# Altium PCB PSoC6 Cardiac Arrest PCB.PcbDoc
Units mil, origin at the board's own origin, x right, y up, seen from the top; angles counter-clockwise.
Board outline 1664 x 1916 mil, 4 copper layers (Top Layer, Layer 1, Layer 2, Bottom Layer), stack 23.756 mil thick; 48 components, 37 nets, 268 pads, 72 vias.
Unrouted connection lines stored in the file: 18.
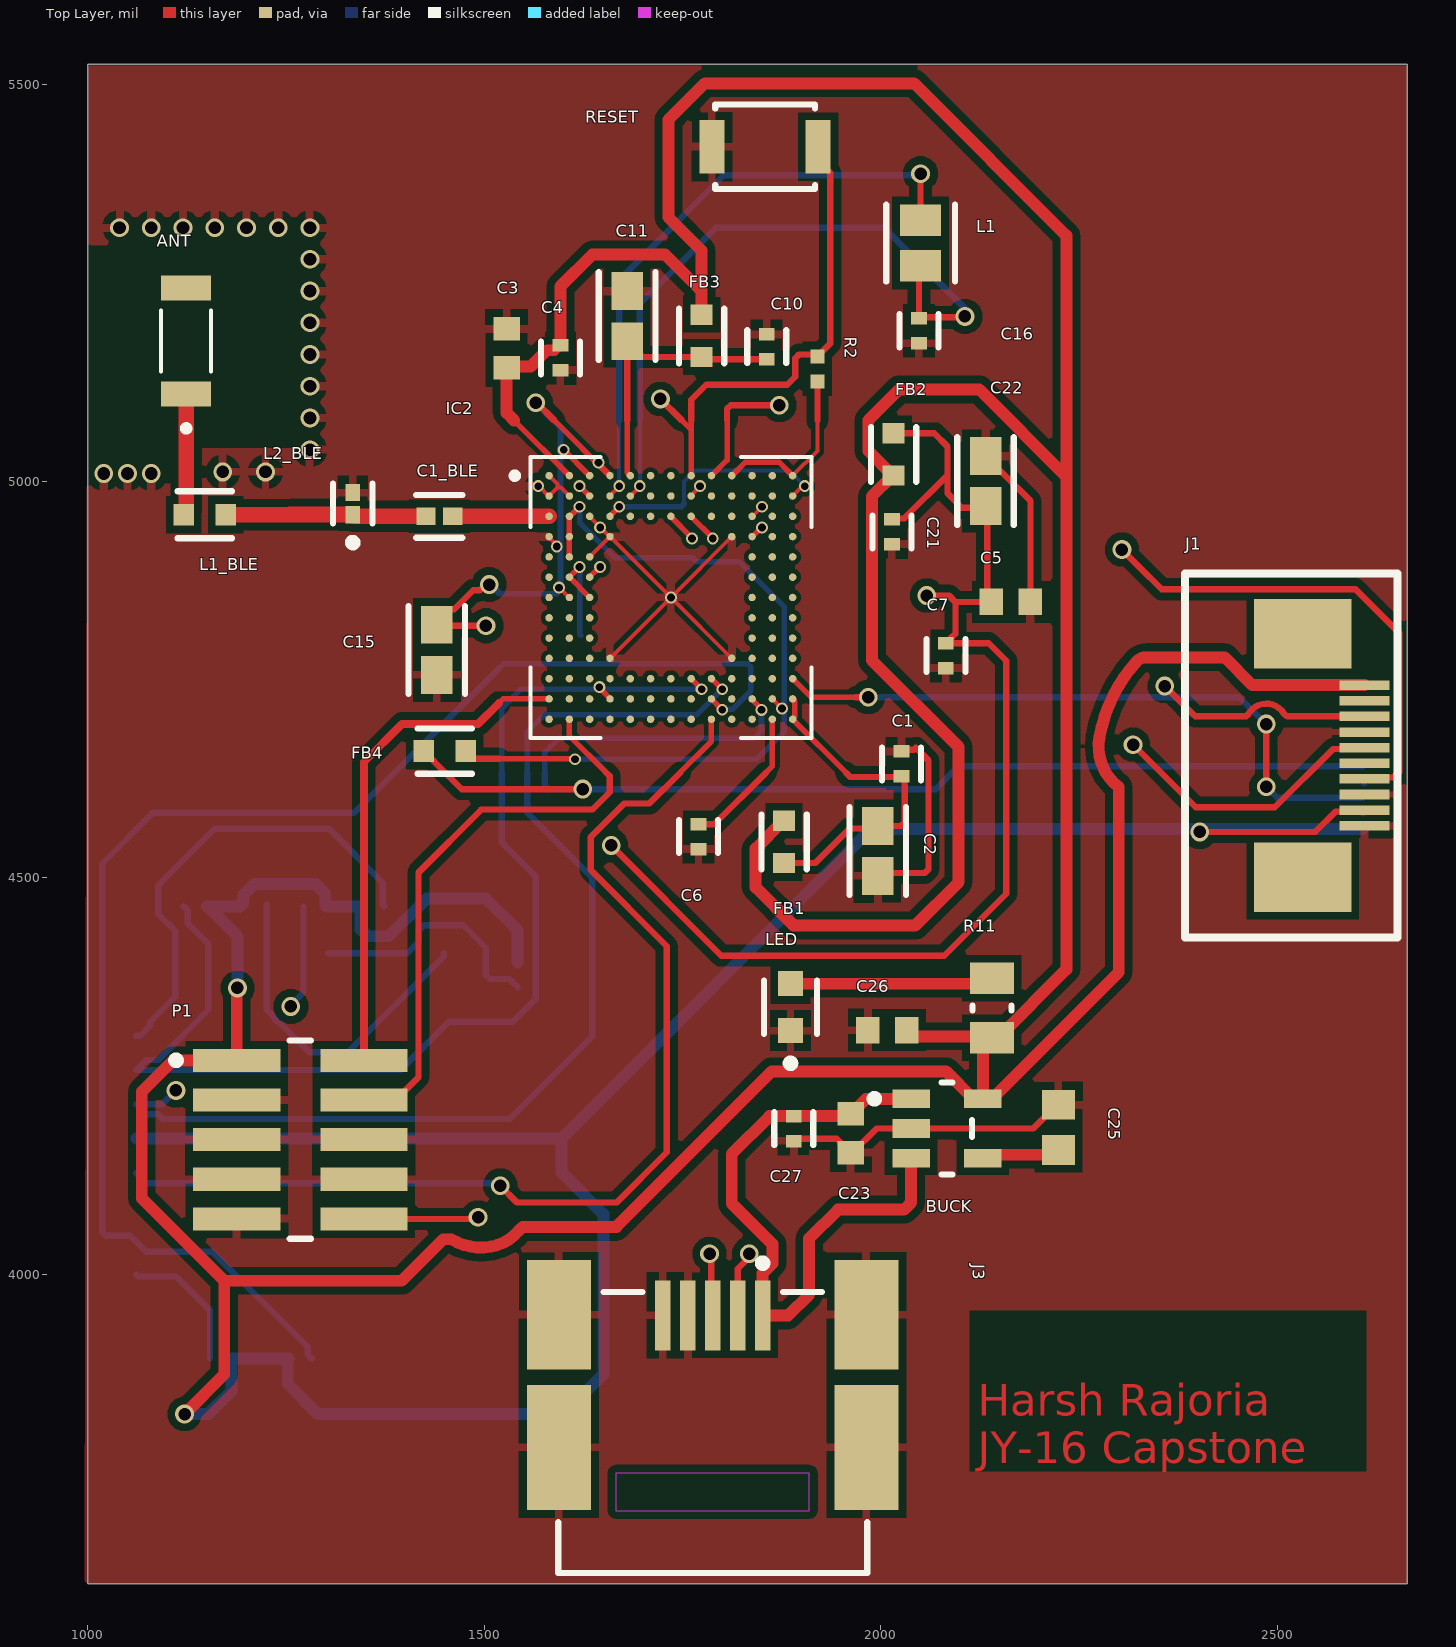
[diagram p0: Top Layer view]
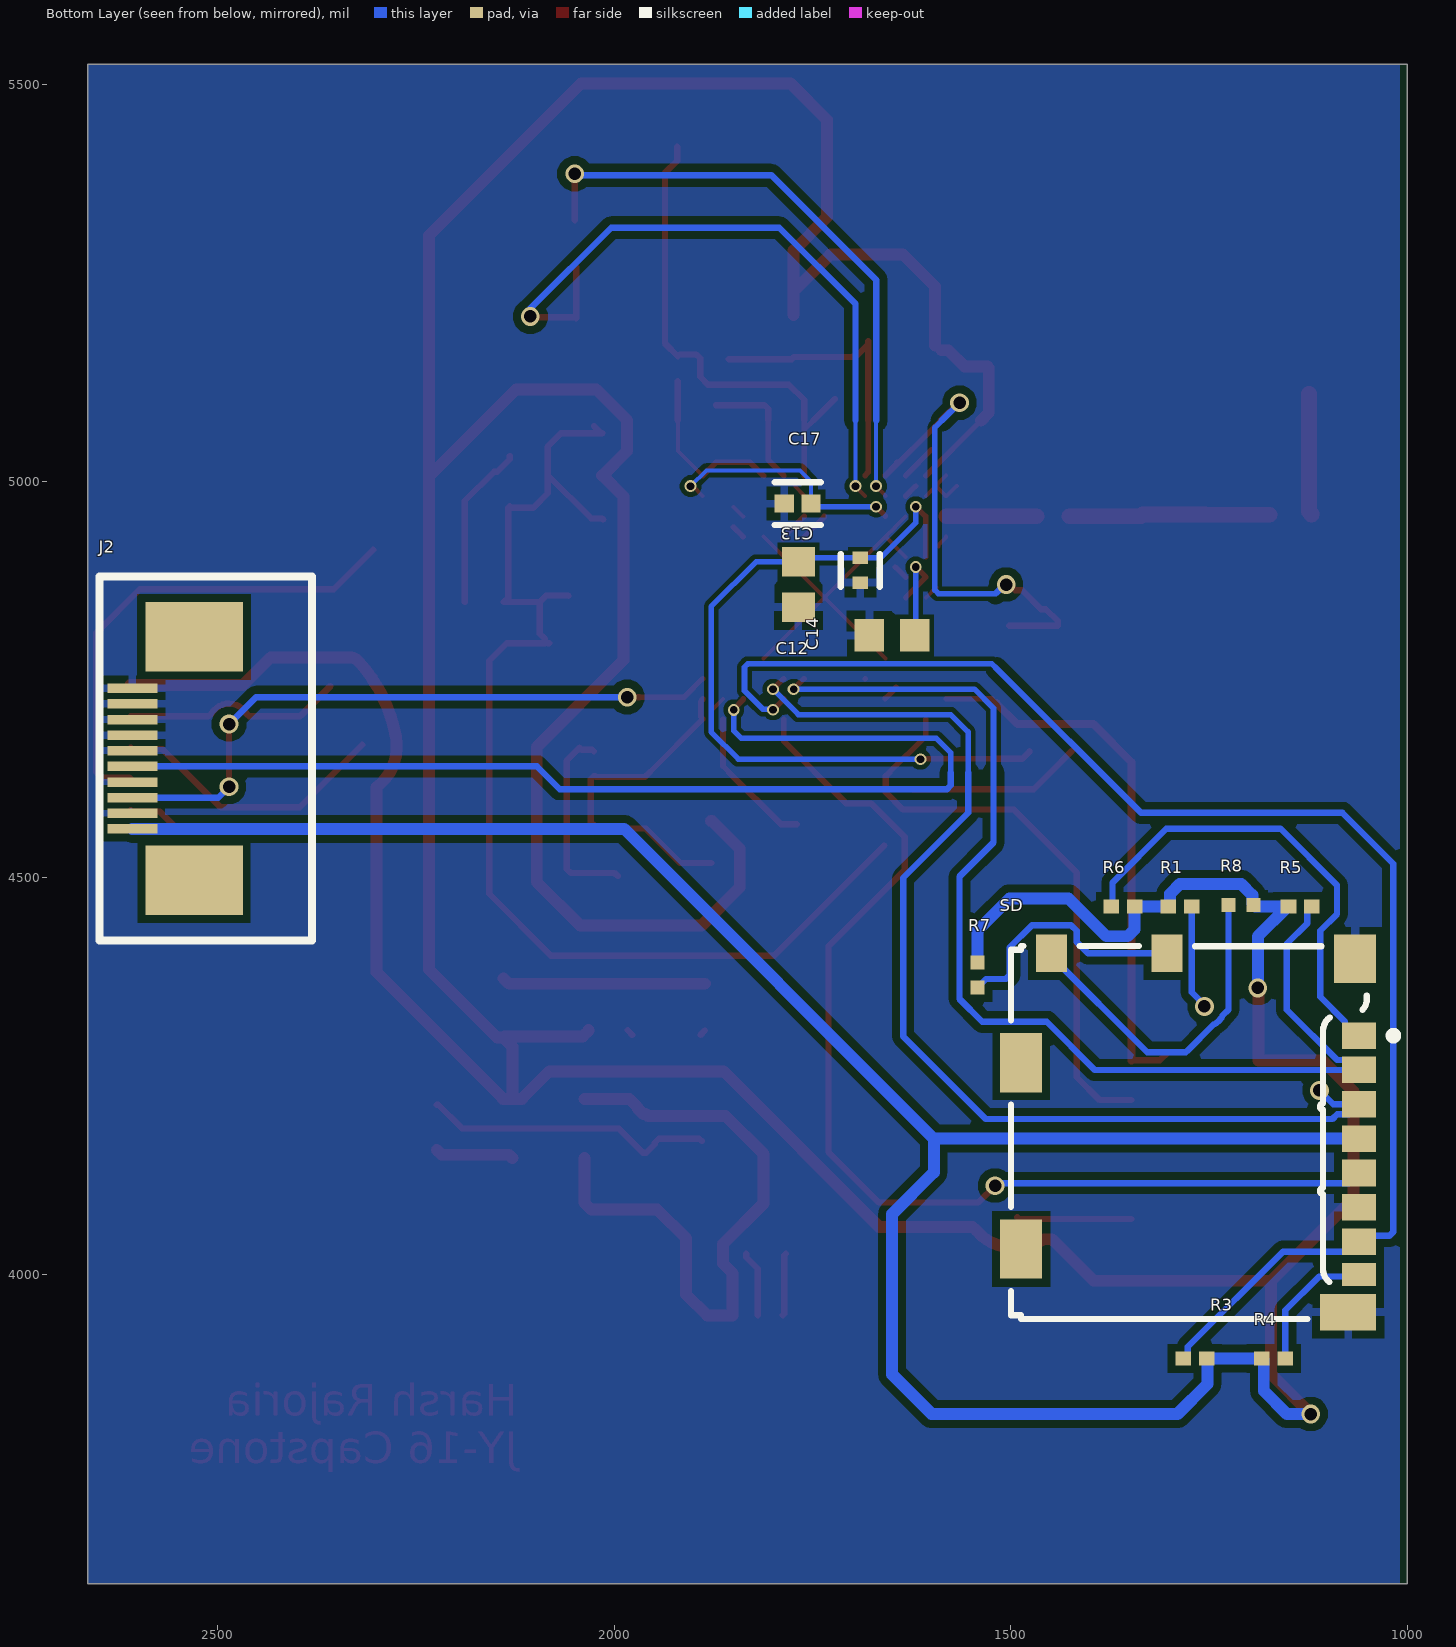
[diagram p1: Bottom Layer view, seen from below]
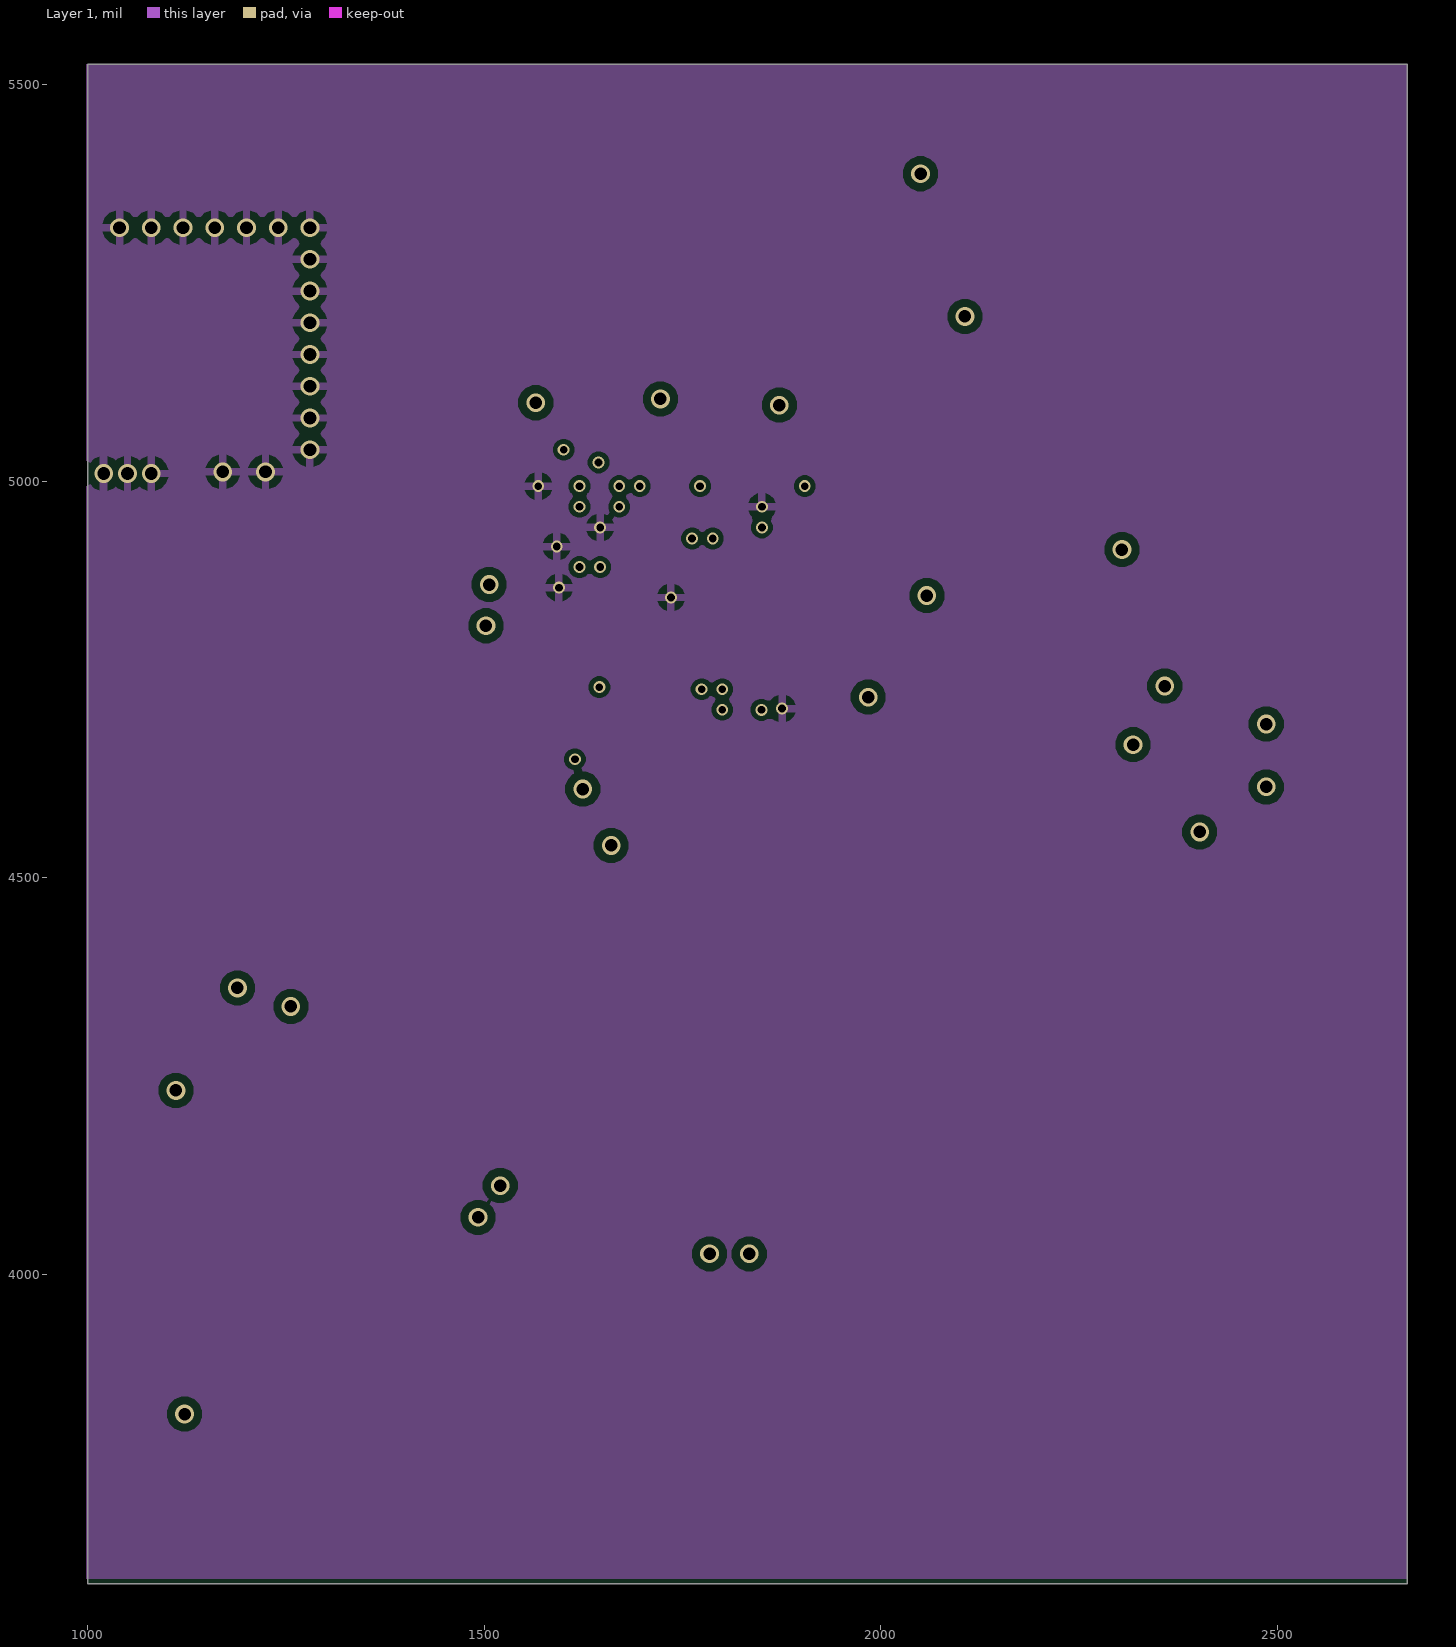
[diagram p2: Layer 1]
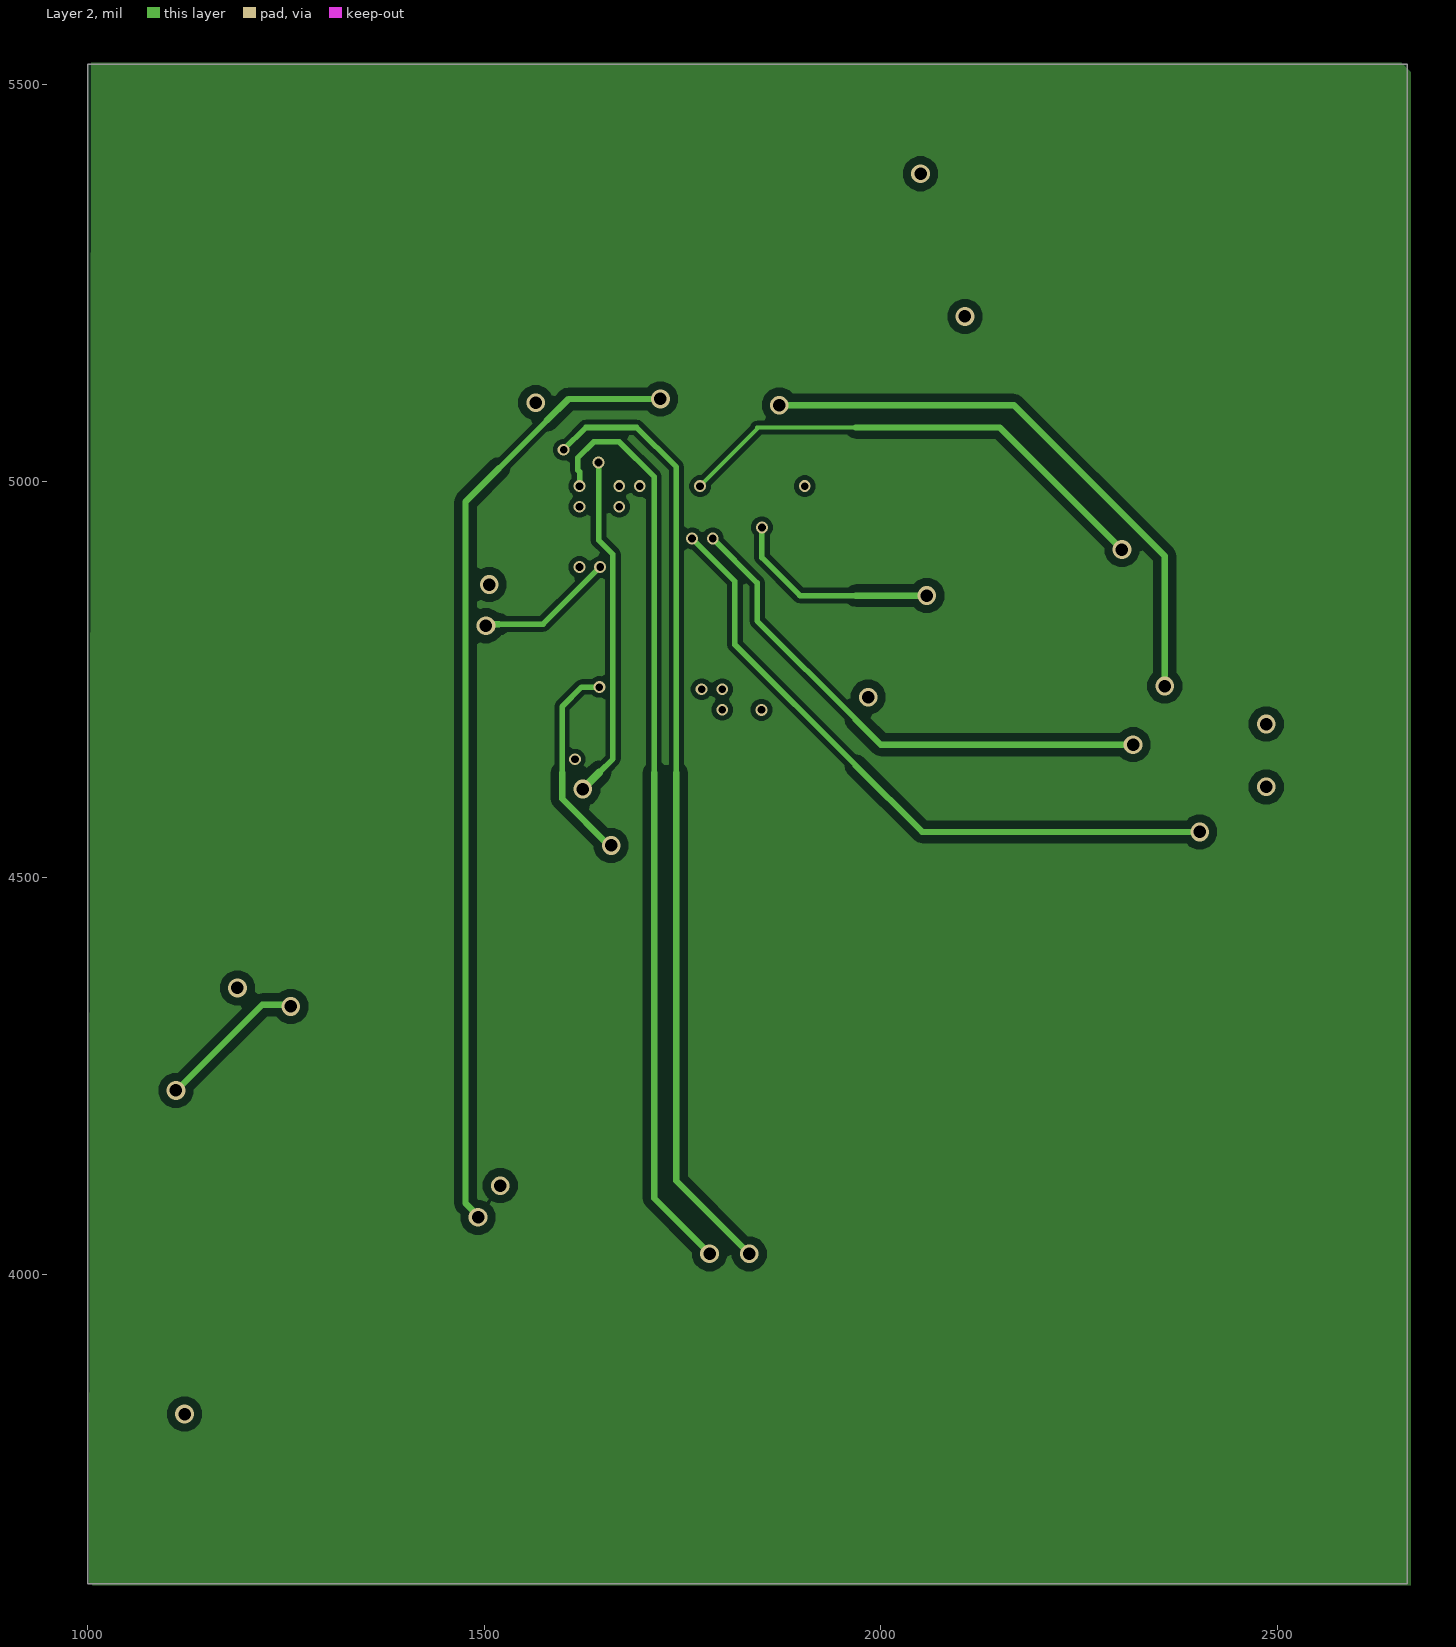
[diagram p3: Layer 2]
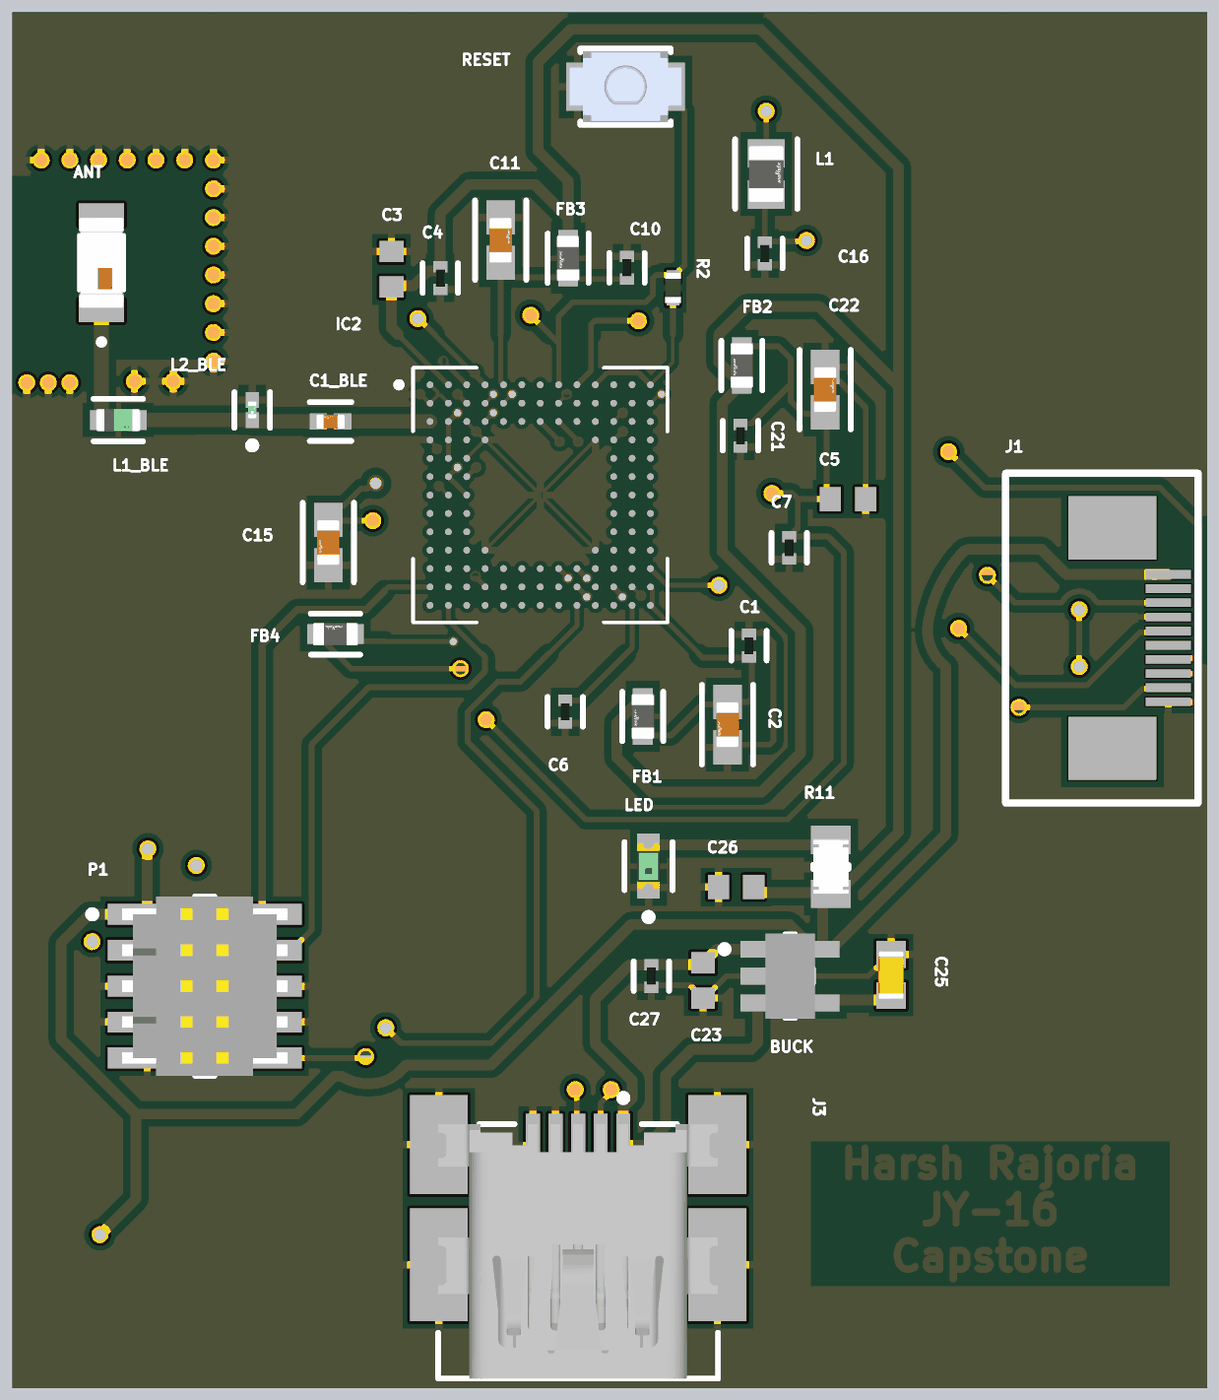
[diagram p4: 3D render of the assembled board from above, using the file's embedded part models]

## Layer stack, top to bottom
Top Solder: solder mask 0.4, Solder Resist, Dk 3.5
Top Layer: signal copper 1.4
Dielectric 2: prepreg 2.8, PP-006, Dk 4.1
Layer 1: signal copper 1.378
Dielectric 1: dielectric 12.6, FR-4, Dk 4.8
Layer 2: signal copper 1.378
Dielectric 3: prepreg 2.8, PP-006, Dk 4.1
Bottom Layer: signal copper 1.4
Bottom Solder: solder mask 0.4, Solder Resist, Dk 3.5

## Board outline
1000,3610 2664,3610 2664,5526 1000,5526

## Design rules (kind name [scope] priority, off if disabled: settings)
Clearance Clearance_BGA [WithinRoom('BGA')] p1: gap=5.98 ignorepadtopadclearanceinfootprint=TRUE except(0: Arc-Hole Track-Hole SMDPad-Hole THPad-Hole Via-Hole Fill-Hole Poly-Hole Region-Hole Text-Hole; 4: SMDPad-Via; 5: Arc-Via Track-Via; 6: Arc-Arc Arc-Track Track-Track; 10: THPad-THPad THPad-Via; 11: Via-Via)
Clearance [All] p2: gap=10 ignorepadtopadclearanceinfootprint=TRUE except(0: Arc-Hole Track-Hole SMDPad-Hole THPad-Hole Via-Hole Fill-Hole Poly-Hole Region-Hole Text-Hole; 6: Arc-SMDPad Track-SMDPad)
PolygonConnect [All] p1: connectstyle=Relief reliefconductorwidth=10 reliefentries=4 polygonreliefangle="90 Angle" airgapwidth=10
RoomDefinition BGA [False] p1: confinementstyle=ConfineIn formatcopy=TRUE lockcomponents=FALSE outline 1518.41,5076.82 1968.41,5076.82 1968.41,4632.82 1518.41,4632.82
RoutingVias RoutingVias_BGA [WithinRoom('BGA')] p1: holewidth=9.84 width=14.96 viastyle="Through Hole" minholewidth=7.87 minwidth=11.81 maxholewidth=9.84 maxwidth=15.75
RoutingVias [All] p2: holewidth=15.75 width=23.62 viastyle="Through Hole" minholewidth=15.75 minwidth=23.62 maxholewidth=15.75 maxwidth=23.62
SolderMaskExpansion SolderMaskExpansion_BGA [WithinRoom('BGA')] p1: expansion=4 istentingtop=TRUE
SolderMaskExpansion [All] p2: expansion=4 istentingtop=FALSE
Width Width_RF [InNet('NetC1_BLE_1') or InNet('NetC1_BLE_2') or InNet('NetANT_1')] p1: maxlimit=20 minlimit=10 preferedwidth=10 toplayer_minwidth=20 toplayer_prefwidth=20 midlayer1_maxwidth=10 midlayer2_maxwidth=10 bottomlayer_maxwidth=10 minimp=50.000000 maximp=50.000000 favimp=50.000000
Width Width_BGA [WithinRoom('BGA')] p2: maxlimit=7 minlimit=5 preferedwidth=6 minimp=50.000000 maximp=50.000000 favimp=50.000000
Width Width_Power [InNet('VCC') Or InNet('VDD')] p3: maxlimit=20 minlimit=15 preferedwidth=15 minimp=50.000000 maximp=50.000000 favimp=50.000000
Width [All] p4: maxlimit=15 minlimit=8 preferedwidth=10 minimp=50.000000 maximp=50.000000 favimp=50.000000
30 further rules are at their usual default settings.

## Components (designator, comment, footprint, x,y, rotation, side; value= is the part's Value field where it differs from the comment)
ANT "2450AT18B100E" XDCR_2450AT18B100E 1124,5177.07 r90 top
BUCK "LD3985M33R" FP-SOT23-5L-7049676-MFG 2083.28,4184 r0 top
C1 "GRM155R71C104KA88D" FP-GRM15-MFG 2025.94,4643.94 r270 top value=0.10μF
C1_BLE "1.2pF" FP-GJM155-0_05-IPC_B 1443.13,4956 r180 top
C2 "10uF" FP-GRM188-0_1-e0_2_0_55-IPC_A 1996,4534 r270 top
C3 "GRM188R61E105KA12D" CAPC1608X90X35LL10T15 1528,5168 r270 top
C4 "GRM155R71C104KA88D" FP-GRM15-MFG 1596,5155.75 r90 top value=0.10μF
C5 "GRM188R61E105KA12D" CAPC1608X90X35LL10T15 2164,4848 r180 top
C6 "GRM155R71C104KA88D" FP-GRM15-MFG 1770,4552 r90 top value=0.10μF
C7 "GRM155R71C104KA88D" FP-GRM15-MFG 2082,4780.25 r90 top value=0.10μF
C10 "GRM155R71C104KA88D" FP-GRM15-MFG 1856,5170 r270 top value=0.10μF
C11 "GRM188R60J106ME47D" FP-GRM188-0_1-e0_2_0_55-IPC_A 1680,5208.43 r90 top
C12 "GRM188R61E105KA12D" CAPC1608X90X35ML10T15 1768,4870 r270 bottom value=1uF
C13 "GRM155R71C104KA88D" FP-GRM15-MFG 1690,4887.75 r270 bottom value=0.10μF
C14 "GRM188R61E105KA12D" CAPC1608X90X35ML10T15 1650,4806 r0 bottom value=1uF
C15 "GRM188R60J106ME47D" FP-GRM188-0_1-e0_2_0_55-IPC_A 1440,4787.57 r270 top
C16 "GRM155R71C104KA88D" FP-GRM15-MFG 2048,5190 r270 top value=0.10μF
C17 "GRM155R60J475ME47D" FP-GRM155-0_1-IPC_B 1768.87,4972 r180 bottom
C21 "0.1uF" FP-GRM15-MFG 2014,4936.25 r90 top value=0.10μF
C22 "10uF" FP-GRM188-0_1-e0_2_0_55-IPC_A 2132,5000.43 r90 top
C23 "GRM188R61E105KA12D" CAPC1608X90X35LL10T15 1962,4178 r90 top
C25 "10nF" CAPC1608X90X35ML10T15 2224,4185.46 r270 top
C26 "GRM188R61E105KA12D" CAPC1608X90X35LL10T15 2008,4308 r0 top
C27 "0.1uF" FP-GRM15-MFG 1890,4184 r90 top value=0.10μF
FB1 "BLM18HE102SN1D" FP-BLM18-0_15-t0_8-MFG 1878,4545.43 r270 top
FB2 "BLM18HE102SN1D" FP-BLM18-0_15-t0_8-MFG 2016,5034 r270 top
FB3 "BLM18HE102SN1D" FP-BLM18-0_15-t0_8-MFG 1774,5183.43 r270 top
FB4 "BLM18HE102SN1D" FP-BLM18-0_15-t0_8-MFG 1450,4660 r180 top
IC2 "CY8C6347BZI-BLD54" BGAS124C65P13X13_900X900X100 1735.18,4853.64 r0 top locked
J1 "IMU FFC" ZF5S-10-01-X-WT 2610,4654.45 r270 top
J2 "PPG FFC" ZF5S-10-01-X-WT 2608,4650.5 r90 bottom
J3 "56579-0576" MOLX-56579-0576_V 1787.9,3948.34 r0 top
L1 "2.2uH" FP-LQM21PH_G0-IPC_C 2050,5300.59 r90 top
L1_BLE "2.7nH" FP-LQP03TG_02-IPC_A 1334,4972.05 r90 top
L2_BLE "3.3nH" FP-LQG18HH_00-MFG 1147.43,4958 r0 top
LED "LTST-C190GKT" FP-LTST-C190GKT-MFG 1886,4337.06 r90 top
P1 "FTSH-105-01-F-DV-K" SMTC-FTSH-105-01-L-DV-K_V 1267.88,4170 r270 top
R1 "10k" RESC1005X40X25LL05T10 1286.76,4464 r0 bottom
R2 "4.7k" RESC1005X40X25LL05T05 1920,5142 r270 top
R3 "10k" RESC1005X40X25LL05T10 1268,3894 r180 bottom
R4 "10k" RESC1005X40X25LL05T10 1168.76,3894 r0 bottom
R5 "10k" RESC1005X40X25LL05T10 1135.24,4464 r0 bottom
R6 "10k" RESC1005X40X25LL05T10 1358.76,4464 r180 bottom
R7 "4.7k" RESC1005X40X25LL05T05 1542,4377.75 r90 bottom
R8 "4.7k" RESC1005X40X25LL05T05 1210,4466 r180 bottom
R11 "CRCW08052K00FKEA" FP-CRCW0805-e3-IPC_B 2140,4336 r270 top
RESET "B3U-1000P" FP-B3U-1000P-MFG 1854,5422 r180 top (schematic designator SW1)
SD "104031-0811" MOLX-104031-0811_V 1274.17,4178.61 r90 bottom

## Footprints (in the part's own frame and the unit in brackets; to place one, negate y for a bottom-side part, rotate by r counter-clockwise, add the part's x,y. Pads: shape width x height; smd on the part's side, far side on the other; paste and mask are expansions set on the pad)
BGAS124C65P13X13_900X900X100 [mm]
  round 0.24 smd: A1(-3.9,3.9) A2(-3.25,3.9) A3(-2.6,3.9) A4(-1.95,3.9) A5(-1.3,3.9) A6(-0.65,3.9) A7(0,3.9) A8(0.65,3.9) A9(1.3,3.9) A10(1.95,3.9) A11(2.6,3.9) A12(3.25,3.9) A13(3.9,3.9) B1(-3.9,3.25) B2(-3.25,3.25) B3(-2.6,3.25) B4(-1.95,3.25) B5(-1.3,3.25) B6(-0.65,3.25) B7(0,3.25) B8(0.65,3.25) B9(1.3,3.25) B10(1.95,3.25) B11(2.6,3.25) B12(3.25,3.25) B13(3.9,3.25) C1(-3.9,2.6) C2(-3.25,2.6) C3(-2.6,2.6) C4(-1.95,2.6) C5(-1.3,2.6) C6(-0.65,2.6) C7(0,2.6) C8(0.65,2.6) C9(1.3,2.6) C10(1.95,2.6) C11(2.6,2.6) C12(3.25,2.6) C13(3.9,2.6) D1(-3.9,1.95) D2(-3.25,1.95) D3(-2.6,1.95) D4(-1.95,1.95) D10(1.95,1.95) D11(2.6,1.95) D12(3.25,1.95) D13(3.9,1.95) E1(-3.9,1.3) E2(-3.25,1.3) E3(-2.6,1.3) E11(2.6,1.3) E12(3.25,1.3) E13(3.9,1.3) F1(-3.9,0.65) F2(-3.25,0.65) F3(-2.6,0.65) F11(2.6,0.65) F12(3.25,0.65) F13(3.9,0.65) G1(-3.9,0) G2(-3.25,0) G3(-2.6,0) G11(2.6,0) G12(3.25,0) G13(3.9,0) H1(-3.9,-0.65) H2(-3.25,-0.65) H3(-2.6,-0.65) H11(2.6,-0.65) H12(3.25,-0.65) H13(3.9,-0.65) J1(-3.9,-1.3) J2(-3.25,-1.3) J3(-2.6,-1.3) J11(2.6,-1.3) J12(3.25,-1.3) J13(3.9,-1.3) K1(-3.9,-1.95) K2(-3.25,-1.95) K3(-2.6,-1.95) K4(-1.95,-1.95) K10(1.95,-1.95) K11(2.6,-1.95) K12(3.25,-1.95) K13(3.9,-1.95) L1(-3.9,-2.6) L2(-3.25,-2.6) L3(-2.6,-2.6) L4(-1.95,-2.6) L5(-1.3,-2.6) L6(-0.65,-2.6) L7(0,-2.6) L8(0.65,-2.6) L9(1.3,-2.6) L10(1.95,-2.6) L11(2.6,-2.6) L12(3.25,-2.6) L13(3.9,-2.6) M1(-3.9,-3.25) M2(-3.25,-3.25) M3(-2.6,-3.25) M4(-1.95,-3.25) M5(-1.3,-3.25) M6(-0.65,-3.25) M7(0,-3.25) M8(0.65,-3.25) M9(1.3,-3.25) M10(1.95,-3.25) M11(2.6,-3.25) M12(3.25,-3.25) M13(3.9,-3.25) N1(-3.9,-3.9) N2(-3.25,-3.9) N3(-2.6,-3.9) N4(-1.95,-3.9) N5(-1.3,-3.9) N6(-0.65,-3.9) N7(0,-3.9) N8(0.65,-3.9) N9(1.3,-3.9) N10(1.95,-3.9) N11(2.6,-3.9) N12(3.25,-3.9) N13(3.9,-3.9)
  silkscreen extent -5.1,-4.5 4.5,4.5
CAPC1608X90X35LL10T15 [mm] "Chip Capacitor, 2-Leads, Body 1.60x0.80mm, IPC High Density"
  rect 0.75x0.85 smd: 1(-0.625,0) 2(0.625,0)
  body extent -0.85,-0.45 0.85,0.45, height 0.9
CAPC1608X90X35ML10T15 [mm] "Chip Capacitor, 2-Leads, Body 1.60x0.80mm, IPC Low Density"
  rect 0.95x1.05 smd: 1(-0.725,0) 2(0.725,0)
  body extent -0.85,-0.45 0.85,0.45, height 0.9
FP-B3U-1000P-MFG [mm]
  rect 0.8x1.7 smd paste+0 mask+0: 1(-1.7,0) 2(1.7,0)
  silkscreen extent -1.6,-1.35 1.6,1.35, body extent -2.2,-1.45 2.2,1.45, height 0.25
FP-BLM18-0_15-t0_8-MFG [mm]
  rect 0.65x0.7 smd paste+0 mask+0: 1(-0.675,0) 2(0.675,0)
  silkscreen extent -0.87,-0.72 0.87,0.72, body extent -1.1,-0.58 1.1,0.58, height 0.25
FP-CRCW0805-e3-IPC_B [mil]
  rect 39.63x55.44 smd paste+0 mask+0: 1(-37.44,0) 2(37.44,0)
  silkscreen extent -3,-25 3,25, body extent -67,-38 67,38, height 10
FP-GJM155-0_05-IPC_B [mil]
  rect 24.23x22.54 smd paste+0 mask+0: 1(-16.87,0) 2(16.87,0)
  silkscreen extent -29,-27 29,27, body extent -35,-17 35,17, height 10
FP-GRM15-MFG [mm]
  rect 0.4x0.5 smd paste+0 mask+0: 1(-0.4,0) 2(0.4,0)
  silkscreen extent -0.53,-0.63 0.53,0.63, body extent -0.7,-0.38 0.7,0.38, height 0.25
FP-GRM155-0_1-IPC_B [mil]
  rect 24.23x22.54 smd paste+0 mask+0: 1(-16.87,0) 2(16.87,0)
  silkscreen extent -29,-27 29,27, body extent -20,-10 20,10, height 24
FP-GRM188-0_1-e0_2_0_55-IPC_A [mil]
  rect 47.57x39.85 smd paste+0 mask+0: 1(-31.57,0) 2(31.57,0)
  silkscreen extent -55,-36 55,36, body extent -75,-40 75,40, height 10
FP-LQG18HH_00-MFG [mm]
  rect 0.65x0.7 smd paste+0 mask+0: 1(-0.675,0) 2(0.675,0)
  silkscreen extent -0.87,-0.75 0.87,0.75, body extent -1.1,-0.58 1.1,0.58, height 0.25
FP-LQM21PH_G0-IPC_C [mil]
  rect 39.61x51.5 smd paste+0 mask+0: 1(-28.59,0) 2(28.59,0)
  silkscreen extent -48,-43 48,43, body extent -52,-31 52,31, height 10
FP-LQP03TG_02-IPC_A [mil]
  rect 21.82x18.22 smd paste+0 mask+0: 1(-13.95,0) 2(13.95,0)
  silkscreen extent -54,-25 25,25, body extent -33,-17 33,17, height 10
FP-LTST-C190GKT-MFG [mm]
  rect 0.8x0.8 smd paste+0 mask+0: 1(-0.75,0) 2(0.75,0)
  silkscreen extent -1.92,-0.85 0.85,0.85, body extent -1.25,-0.55 1.25,0.55, height 0.25
FP-SOT23-5L-7049676-MFG [mm]
  rect 1.2x0.6 smd paste+0 mask+0: 1(-1.15,0.95) 2(-1.15,0) 3(-1.15,-0.95) 4(1.15,-0.95) 5(1.15,0.95)
  silkscreen extent -2.45,-1.48 0.8,1.47, body extent -1.85,-1.58 1.85,1.57, height 0.25
MOLX-56579-0576_V [mm] "SMD, 5-Leads, body 9.9x9mm, Pitch 0.8mm"
  rect 0.5x2.25 smd: 1(1.6,0) 2(0.8,0) 3(0,0) 4(-0.8,0) 5(-1.6,0)
  rect 2.05x3.5 smd: 6(4.925,0.025) 7(-4.925,0.025)
  rect 2.05x4 smd: 8(4.925,-4.225) 9(-4.925,-4.225)
  Top Layer keep-out region: -3.1,-6.25 3.1,-6.25 3.1,-5.05 -3.1,-5.05
  silkscreen extent -4.95,-8.25 4.95,1.8, body extent -4.95,-8.25 4.95,0.75, height 3.93
MOLX-104031-0811_V [mm] "Micro SD, 8-Leads, Body 11.95x11.4mm, Pitch 1.1mm"
  rect 0.85x1.1 smd: 1(3.113,-5.412) 2(2.013,-5.412) 3(0.913,-5.412) 4(-0.188,-5.412) 5(-1.288,-5.412) 6(-2.387,-5.412) 7(-3.487,-5.412)
  rect 0.75x1.1 smd: 8(-4.537,-5.412)
  rect 1.2x1 smd: 9(5.748,0.738) 10(5.748,4.438)
  rect 1.55x1.35 smd: 11(5.573,-5.287)
  rect 1.17x1.8 smd: 12(-5.747,-5.062)
  rect 1.9x1.35 smd: 13(-3.722,5.413) 14(2.248,5.413)
  silkscreen extent -5.97,-6.64 5.98,5.74, body extent -5.97,-5.66 5.98,5.74, height 1.45
RESC1005X40X25LL05T05 [mm] "Chip Resistor, 2-Leads, Body 1.05x0.55mm, IPC High Density"
  rect 0.45x0.45 smd: 1(-0.4,0) 2(0.4,0)
  body extent -0.53,-0.28 0.53,0.28, height 0.4
RESC1005X40X25LL05T10 [mm] "Chip Resistor, 2-Leads, Body 1.00x0.50mm, IPC High Density"
  rect 0.5x0.45 smd: 1(-0.375,0) 2(0.375,0)
  body extent -0.53,-0.27 0.53,0.28, height 0.4
SMTC-FTSH-105-01-L-DV-K_V [mm] "CONN, 10-Leads, Body 6.35x3.43mm, Pitch 1.27mm"
  rect 0.74x2.79 smd: 1(-2.54,-2.035) 2(-2.54,2.035) 3(-1.27,-2.035) 4(-1.27,2.035) 5(0,-2.035) 6(0,2.035) 7(1.27,-2.035) 8(1.27,2.035) 9(2.54,-2.035) 10(2.54,2.035)
  silkscreen extent -3.17,-4.1 3.17,0.34, body extent -3.17,-2.92 3.18,2.92, height 6.12
XDCR_2450AT18B100E [mm]
  rect 0.8x1.6 smd: 1(-1.7,0) 2(1.7,0)
  silkscreen extent -2.9,-0.8 0.98,0.8, body extent -1.6,-0.8 1.6,0.8, height 0.7
ZF5S-10-01-X-WT [mil]
  rect 12x63 smd mask+2: 1(-88.65,0) 2(-68.95,0) 3(-49.25,0) 4(-29.55,0) 5(-9.85,0) 6(9.85,0) 7(29.55,0) 8(49.25,0) 9(68.95,0) 10(88.65,0)
  rect 88x123 smd mask+2: G1(-153.5,-78) G2(153.5,-78)
  silkscreen extent -230,-227 230,42

## Part data
ANT: "2.4GHz - Chip RF Antenna 2.4GHz ~ 2.5GHz 0.5dBi Solder Surface Mount", Package=None, Availability="In Stock", Check_prices=https://www.snapeda.com/parts/2450AT18B100E/Johanson+Technology+Inc./view-part/?ref=eda, MF="Johanson Technology", MP=2450AT18B100E, Price=None, Purchase-URL=https://pricing.snapeda.com/search/part/2450AT18B100E/?ref=eda, SnapEDA_Link=https://www.snapeda.com/parts/2450AT18B100E/Johanson+Technology+Inc./view-part/?ref=snap
BUCK: library part CMP-0244-00328-2, "IC REG LINEAR 3.3V 150MA SOT23-5", Case/Package=SOT-23, Dropout Voltage=60mV, Input Bias Current=85uA, Max Input Voltage=6V, Max Operating Temperature=125°C, Max Output Current=150mA, Min Current Limit=300mA, Min Input Voltage=2.5V, Min Operating Temperature=-40°C, Min Output Voltage=3.3V, Output Voltage Accuracy=2%, Package Quantity=1, Quiescent Current=150uA, Accuracy=2%, Height=1.3mm, Lead Free="Lead Free", Length=3mm, Mount="Surface Mount", Number of Outputs=1, Number of Pins=5, Number of Regulators=1, Output Current=150mA, Output Type=Fixed, Output Voltage=3.3V, Packaging="Tape and Reel", Polarity=Positive, Radiation Hardening=No, Width=1.75mm
C1 C4 C6 C7 C10 C13 C16: library part CMP-2100-03641-2, "CAP CER 0.1UF 16V X7R 0402", Capacitance=0.10μF, Manufacturer=Murata, Package=GRM15, Temperature="-55°C to +125°C", Temperature Characteristic=X7R, Temperature Range High=+125°C, Temperature Range Low=-55°C, Tolerance=10%, Voltage Rating=16Vdc, Category=Cap, ComponentLink2Description=Datasheet, ComponentLink2URL=https://search.murata.co.jp/Ceramy/image/img/A01X/G101/ENG/GRM155R71H471KA01-01A.pdf, Device Class L1="Passive Components", Device Class L2=Capacitors, Device Class L3="Ceramic Capacitors", Digikey Description="CAP CER 0.1UF 16V X7R 0402", Height=0.55mm, Ipc Land Pattern Name=CAPC10050X219, Lead Free=yes, Manufacturer Part Number=GRM155R71C104KA88D, Material=Ceramic, Mouser Description="0402 0.1 uF 16V ±10 % Tolerance X7R SMT Multilayer Ceramic Capacitor", Octopart=https://octopart.com/grm155r71c104ka88d-murata-196880, RoHS=TRUE, Standoff Height=0mm
C1_BLE: library part CMP-2008-03813-2, "Multi-Layer Ceramic Capacitor 1.2pF C0G  ±0.1pF 0402 Paper T/R", Case Code (Imperial)=0402, Case Code (Metric)=1005, Dielectric=C0G, Max Operating Temperature=125°C, Min Operating Temperature=-55°C, Package Quantity=10000, Temperature Coefficient=30ppm/°C, Voltage=50V, Capacitance=1.2pF, Case/Package=0402, Depth=0.5mm, Height=0.5mm, Lead Free="Lead Free", Lead Pitch=0.3mm, Length=1mm, Mount="Surface Mount", Number of Pins=2, Packaging="Tape and Reel", Radiation Hardening=No, REACH SVHC="No SVHC", Termination=SMD/SMT, Thickness=0.022inch, Voltage Rating=50V, Voltage Rating (DC)=50V, Weight=2.3E-05oz, Width=0.5mm
C2 C22: library part CMP-2006-02792-2, "Chip Multilayer Ceramic Capacitors for General Purpose, 0603, 10uF, X5R, 15%, 20%, 6.3V", Case Code (Imperial)=0603, Case Code (Metric)=1608, Dielectric=X5R, Max Operating Temperature=85°C, Min Operating Temperature=-55°C, Package Quantity=4000, Tolerance=20%, Voltage=6.3V, Capacitance=10uF, Case/Package=0603, Depth=0.8mm, Height=0.8mm, Lead Free="Lead Free", Length=1.6mm, Material=Ceramic, Mount="Surface Mount", Packaging="Tape and Reel", Radiation Hardening=No, REACH SVHC="No SVHC", Termination=SMD/SMT, Thickness=0.035inch, Voltage Rating=6.3V, Voltage Rating (DC)=6.3V, Width=0.031inch
C3 C5 C12 C14 C23 C26: library part CMP-2006-02459-1, Manufacturer=Murata, Part Number=GRM188R61E105KA12D
C11 C15: library part CMP-2006-02792-2, "Chip Multilayer Ceramic Capacitors for General Purpose, 0603, 10uF, X5R, 15%, 20%, 6.3V", Capacitance=10uF, Case Code (Imperial)=0603, Case Code (Metric)=1608, Dielectric=X5R, Max Operating Temperature=85°C, Min Operating Temperature=-55°C, Package Quantity=4000, Tolerance=20%, Voltage=6.3V, Case/Package=0603, Depth=0.8mm, Height=0.8mm, Lead Free="Lead Free", Length=1.6mm, Material=Ceramic, Mount="Surface Mount", Packaging="Tape and Reel", Radiation Hardening=No, REACH SVHC="No SVHC", Termination=SMD/SMT, Thickness=0.035inch, Voltage Rating=6.3V, Voltage Rating (DC)=6.3V, Width=0.031inch
C17: library part CMP-2008-04549-2, "Chip Multilayer Ceramic Capacitors for General Purpose, 0402, 4.7uF, X5R, 15%, 20%, 6.3V", Capacitance=4.7uF, Case Code (Imperial)=0402, Case Code (Metric)=1005, Dielectric=X5R, Max Operating Temperature=85°C, Min Operating Temperature=-55°C, Package Quantity=10000, Tolerance=20%, Voltage=6.3V, Case/Package=0402, Contact Plating=Tin, Depth=0.5mm, Height=0.5mm, Lead Free="Lead Free", Length=1mm, Mount="Surface Mount", Packaging="Tape and Reel", REACH SVHC="No SVHC", Termination=SMD/SMT, Thickness=0.022inch, Voltage Rating=6.3V, Voltage Rating (DC)=6.3V, Weight=0.000212oz, Width=0.02inch
C21 C27: library part CMP-2100-03641-2, "CAP CER 0.1UF 16V X7R 0402", Capacitance=0.10μF, Manufacturer=Murata, Manufacturer Part Number=GRM155R71C104KA88D, Package=GRM15, Temperature="-55°C to +125°C", Temperature Characteristic=X7R, Temperature Range High=+125°C, Temperature Range Low=-55°C, Tolerance=10%, Voltage Rating=16Vdc, Category=Cap, ComponentLink2Description=Datasheet, ComponentLink2URL=https://search.murata.co.jp/Ceramy/image/img/A01X/G101/ENG/GRM155R71H471KA01-01A.pdf, Device Class L1="Passive Components", Device Class L2=Capacitors, Device Class L3="Ceramic Capacitors", Digikey Description="CAP CER 0.1UF 16V X7R 0402", Height=0.55mm, Ipc Land Pattern Name=CAPC10050X219, Lead Free=yes, Material=Ceramic, Mouser Description="0402 0.1 uF 16V ±10 % Tolerance X7R SMT Multilayer Ceramic Capacitor", Octopart=https://octopart.com/grm155r71c104ka88d-murata-196880, RoHS=TRUE, Standoff Height=0mm
C25: library part CMP-2100-03642-1, "Chip Capacitor, 10 nF, +/- 10%, 50 V, -55 to 125 degC, 0603 (1608 Metric), RoHS, Tape and Reel", Case Code (Imperial)=0603, Case Code (Metric)=1608, Dielectric=X7R, Dielectric Material=Ceramic, Insulation Resistance=10GR, Manufacturer=Murata, Max Operating Temperature=125degC, Min Operating Temperature=-55degC, Package Description="2-Pin Surface Mount Device, Body 1.6 x 0.8 mm", Package Quantity=1, Tolerance=10%, Voltage=50V, Capacitance=10nF, Case/Package=0603, Datasheet URL=http://search.murata.co.jp/Ceramy/image/img/A01X/G101/ENG/GRM188R71H103KA01-01.pdf, Datasheet Version=42401.0, Depth=0.8mm, Height=0.8mm, Lead Free=LeadFree, Length=1.6mm, Manufacturer URL=http://www.murata.com/, Material=Ceramic, Mount=SurfaceMount, Number of Pins=2, Package Reference=0603, Packaging=TapeandReel, REACH SVHC=Unknown, RoHSCompliant=True, Termination=SMD/SMT, Thickness=0.035inch, Voltage Rating=50V, Voltage Rating (DC)=50V, Width=0.031inch
FB1 FB2 FB3 FB4: library part CMP-0686-00363-3, "Chip Ferrite Bead, 0603, 1000Ω @ 100MHz, 0.35Ω, 25%, 600mA", Case Code (Imperial)=0603, Case Code (Metric)=1608, Current Rating=600mA, DC Resistance (DCR)=350mR, Max Operating Temperature=125°C, Min Operating Temperature=-55°C, Package Quantity=1, Test Frequency=100MHz, Tolerance=25%, Case/Package=0603, Core Material=Ferrite, DC Current=600mA, Depth=0.8mm, Height=0.8mm, Impedance=1kR, Lead Free="Lead Free", Length=1.6mm, Material=Steel, Max Current Rating=600mA, Max DC Current=600mA, Military Standard=Not, Number of Circuits=1, Number of Lines=1, Number of Pins=2, Packaging="Tape and Reel", Radiation Hardening=No, REACH SVHC="No SVHC", Termination=SMD/SMT, Width=0.8mm
IC2: "Integrated Circuit", Manufacturer_Name="Cypress Semiconductor", Mouser Part Number=727-CY8C6347BZIBLD54, Arrow Part Number=CY8C6347BZI-BLD54, Arrow Price/Stock=https://www.arrow.com/en/products/cy8c6347bzi-bld54/cypress-semiconductor, Datasheet Link=https://www.arrow.com/en/products/cy8c6347bzi-bld54/cypress-semiconductor, Height=1mm, Manufacturer_Part_Number=CY8C6347BZI-BLD54, Mouser Price/Stock=https://www.mouser.co.uk/ProductDetail/Cypress-Semiconductor/CY8C6347BZI-BLD54/?qs=XeJtXLiO41TbiRPpjrRqiA%3D%3D
J1 J2: library part ZF5S-10-01-X-WT, "ZERO INSERTION FORCE 0.5MM ASSEMBLY, 01 LEAD STYLE.", Manufacturer=SAMTEC, CREATED="January 30, 2015 - Wendy Xin", PCB DECAL=ZF5S-10-01-X-WT
J3: library part CMP-2000-05643-1, "USB Connector, 30 V, 1 A, 0 to 50 degC, 5-Pin SMD, RoHS, Tape and Reel", Color=Gray, Current Rating=1A, Flammability Rating=UL94V-0, Insulation Resistance=100MOhms, Manufacturer=Molex, Operating Temperature Range=0Cto+50C, Package Description="5-Pin Surface Mount Device, Body 9.9 x 9 mm, Pitch 0.8 mm", Voltage Rating=30VAC/DC, Brand=Molex, Connector Type=MiniUSBTypeABReceptacle, Contact Material=CopperAlloy, Contact Plating=Gold, Datasheet URL=http://www.molex.com/pdm_docs/sd/565790576_sd.pdf, Datasheet Version="Rev. E, 04/2006", Factory Pack Quantity=800, Features=MetalshieldingforESDprotection, Gender=Female, Manufacturer URL=http://www.molex.com/, Mounting Angle=Right, Mounting Technology=SurfaceMount, Number of Contacts=5Contact, Number of Ports=1Port, Package Reference=56579-0576, Packaging=Reel, Product=MiniUSBTypeABConnectors, Product Category=USBConnectors, RoHS=Details, Series=56579, Standard=USB, Termination Style=SolderTab
L1: library part CMP-06042-016317-1, "Multilayer Type Inductor for Power Lines, 0805 (2012), 2.2μH, 30%, 0.288Ω, 0.8A", Case Code (Imperial)=0805, Case Code (Metric)=2012, Current Rating=800mA, DC Resistance (DCR)=288mR, Inductance Tolerance=30%, Max Operating Temperature=125°C, Min Operating Temperature=-55°C, Package Quantity=4000, Self Resonant Frequency=40MHz, Test Frequency=1MHz, Case/Package=0805, Core Material=Ferrite, DC Current=800mA, Depth=1.4mm, Height=0.9mm, Height - Seated (Max)=0.039inch, Inductance=2.2uH, Lead Free="Lead Free", Length=2mm, Max DC Current=800mA, Military Standard=Not, Mount="Surface Mount", Packaging="Tape and Reel", Radiation Hardening=No, REACH SVHC="No SVHC", RoHS Compliant=Yes, Series=LQM, Shielding=Shielded, Termination=SMD/SMT, Tolerance=30%, Width=0.049inch
L1_BLE: library part CMP-06042-013213-1, "Film type RF Inductor 2.7nH ±0.1nH 500mA 0.2Ω 0201 (0603)", Case Code (Imperial)=0201, Case Code (Metric)=0603, Current=350mA, Current Rating=500mA, DC Resistance (DCR)=200mR, Max Operating Temperature=125°C, Min Operating Temperature=-55°C, Package Quantity=15000, Resistor Type="Thin Film", Self Resonant Frequency=6GHz, Test Frequency=500MHz, Tolerance=3%, Case/Package=0201, Core Material=Non-Magnetic, DC Current=500mA, Depth=0.33mm, Height=0.3mm, Height - Seated (Max)=0.013inch, Inductance=2.7nH, Lead Free="Lead Free", Length=0.024inch, Max DC Current=500mA, Military Standard=Not, Mount="Surface Mount", Packaging="Tape and Reel", Q Factor=14, Radiation Hardening=No, REACH SVHC="No SVHC", Shielding=Unshielded, Termination=SMD/SMT, Width=0.3mm
L2_BLE: library part CMP-06042-009861-1, "Multilayer type RF Inductor 3.3nH ±0.3nH 0.12Ω 1000mA 0603", Case Code (Imperial)=0603, Case Code (Metric)=1608, Current Rating=500mA, DC Resistance (DCR)=150mR, Max Operating Temperature=85°C, Min Operating Temperature=-55°C, Package Quantity=4000, Self Resonant Frequency=6GHz, Test Frequency=100MHz, Case/Package=0603, Core Material=Air, DC Current=500mA, Depth=0.95mm, Height=0.8mm, Height - Seated (Max)=0.037inch, Inductance=3.3nH, Lead Free="Lead Free", Length=1.6mm, Max DC Current=500mA, Military Standard=Not, Mount="Surface Mount", Packaging="Tape and Reel", Q Factor=12, Radiation Hardening=No, REACH SVHC="No SVHC", Shielding=Unshielded, Termination=SMD/SMT, Width=0.8mm
LED: library part CMP-22017-000005-2, "LED GREEN CLEAR CHIP SMD", Case Code (Imperial)=0603, Case Code (Metric)=1608, Color=Green, Forward Current=30mA, Forward Voltage=2.1V, Lens Color=Colorless, Max Operating Temperature=85°C, Min Operating Temperature=-55°C, Package Quantity=1, Power Dissipation=100mW, Reverse Voltage=5V, Test Current=10mA, Voltage=2V, Case/Package=0603, Depth=0.8mm, Dominant Wavelength=569nm, Height=0.8mm, Illumination Color=Green, Lead Free="Lead Free", Length=1.6mm, Lens Style=Clear, Lens Transparency=Clear, Luminous Intensity=6mcd, Mount="Surface Mount", Number of Elements=1, Number of LEDs=1, Number of Pins=2, Packaging="Tape and Reel", Power Rating=100mW, Radiation Hardening=No, Viewing Angle=130°, Wavelength=565nm, Width=0.8mm
P1: library part CMP-2000-05352-1, "Male Header, Pitch 1.27 mm, 2 x 5 Position, Height 6.12 mm, RoHS, Tube", Color=Black, Manufacturer=Samtec, Package Description="Male Header, Pitch 1.27 mm, 2 x 5 Position, Height 5.97 mm, Tail Length 4.32 mm", Package Reference=FTSH-105-01-L-DV-K, Category=Connectors,Interconnects, Connector Type=Header,Shrouded, Contact Finish=Gold, Contact Finish Thickness=3µin(0.08µm), Contact Mating Length="0.120\"(3.05mm)", Contact Type=MalePin, Datasheet URL=http://suddendocs.samtec.com/prints/ftsh-1xx-xx-xxx-dv-xxx-mkt.pdf, Datasheet Version="Rev. ET, 10/1995", Family=RectangularConnectors-Headers,MalePins, Fastening Type=-, Features=-, Manufacturer URL=http://www.samtec.com/, Mounting Type=SurfaceMount, Number of Positions=10, Number of Positions Loaded=All, Number of Rows=2, Package URL=http://suddendocs.samtec.com/prints/ftsh-1xx-xx-xxx-dv-xxx-footprint.pdf, Packaging=Tube, Pitch="0.050\"(1.27mm)", Row Spacing="0.050\"(1.27mm)", Series=FTSH, Termination=Solder
R1 R3 R4 R5 R6: library part CMP-2002-07353-1, Manufacturer="Yageo / Phycomp", Part Number=RC0402FR-0710KL
R2 R7 R8: library part CMP-2002-01154-4, "Chip Resistor, 4.7 KOhm, +/- 1%, 0.1 W, -55 to 155 degC, 0402 (1005 Metric), RoHS, Tape and Reel", Case Code (Imperial)=0402, Case Code (Metric)=1005, Max Operating Temperature="155 degC", Min Operating Temperature="-55 degC", Package Quantity=1, PartNumber=ERJ-2RKF4701X, Power Rating="100 mW", Resistance="4.7 KOhm", Tolerance=1%, Voltage Rating="50 V", Case\/Package=0402, ComponentLink1Description="Manufacturer URL", ComponentLink1URL=http://www.panasonic.com/, ComponentLink2Description=Datasheet, ComponentLink2URL=http://industrial.panasonic.com/cdbs/www-data/pdf/RDA0000/AOA0000C86.pdf, DatasheetVersion=04/2015, Height="0.35 mm", Length="1 mm", Mount="Surface Mount", Mounting Technology="Surface Mount", PackageDescription="2-Pin Surface Mount Device, Body 1 x 0.5 mm", PackageReference=0402, Packaging="Cut Tape", Pins=2, Radiation Hardening=No, REACH SVHC=Yes, RoHSCompliant=true, Width="0.5 mm"
R11: library part CMP-2001-03755-2, "RES Thick Film, 2kΩ, 1%, 0.125W, 100ppm/°C, 0805", Case Code (Imperial)=0805, Case Code (Metric)=2012, Max Operating Temperature=155°C, Max Power Dissipation=125mW, Min Operating Temperature=-55°C, Package Quantity=10, Resistance=2kR, Temperature Coefficient=100ppm/°C, Tolerance=1%, Voltage Rating=150V, Case/Package=0805, Composition="Thick Film", Contact Plating=Tin, Depth=1.25mm, Features="Automotive AEC-Q200", Height=0.02inch, Lead Free="Lead Free", Length=2mm, Military Standard=Not, Mount="Surface Mount", Number of Pins=2, Number of Terminals=2, Number of Terminations=2, Packaging="Tape and Reel", Power Rating=125mW, Radiation Hardening=No, Termination=SMD/SMT, Voltage Rating (DC)=150V, Weight=0.000194oz, Width=1.25mm, Working Voltage=150V
RESET: library part CMP-2100-03586-2, "SWITCH TACTILE SPST-NO 0.05A 12V", Contact Current Rating=50mA, Contact Resistance=100mR, Insulation Resistance=100MR, Max Operating Temperature=70°C, Max Voltage Rating (DC)=12V, Min Operating Temperature=-25°C, Operating Force=1.5N, Package Quantity=1, Ratings="Dust Proof", Actuator Length=0.4mm, Actuator Type=Standard, Contact Material=Silver, Current Rating=50mA, Depth=2.5mm, Electrical Life=200000Cycles, Height=1.2mm, Illumination Type=Non-Illuminated, Lead Free="Lead Free", Length=4mm, Max Current Rating=50mA, Mechanical Life=200000Cycles, Mount="Surface Mount", Orientation=Straight, Packaging="Tape and Reel", Switch Function=Off-Mom, Switch Travel=0.15mm, Termination=SMD/SMT, Throw Configuration=SPST, Voltage Rating (DC)=12V, Weight=0.000776oz, Width=3mm
SD: library part CMP-2000-05825-1, "Micro SD Card, RA, -25 to 85 degC, 8-Pin SMD, RoHS, Tape and Reel", Current Rating=500mA, Manufacturer=Molex, Package Description="8-Pin Surface Mount Device, Body 11.95 x 11.4 mm, Pitch 1.1 mm", Voltage Rating=10VAC/DC, Brand=Molex, Card Type=microSD, Contact Material=PhosphorBronze, Contact Plating=Gold, Datasheet URL=http://www.molex.com/pdm_docs/sd/1040310811_sd.pdf, Datasheet Version="Rev. E, 04/2006", Height=1.42mm, Housing Material=LiquidCrystalPolymer(LCP), Insertion - Extraction Style=Push-Pull, Length=11.4mm, Manufacturer URL=http://www.molex.com/, Mating Cycles=10000, Mounting Technology=SurfaceMount, Mounting Type=Standard, Number of Contacts=8, Number of Rows=1Row, Orientation=RightAngle, Package Reference=104031-0811, Packaging=Reel, Pitch=1.1mm, Product=CardConnectors, Product Category=MemoryCardConnectors, RoHS=True, Series=104031, Termination Style=SMD

## Via types
v1: diameter 23.62, hole 16, Top Layer to Layer 1, 19 vias
v2: diameter 23.62, hole 15.75, Top Layer to Layer 2, 13 vias
v3: diameter 23.62, hole 15.75, Top Layer to Bottom Layer, 11 vias
v4: diameter 14.96, hole 9.84, Top Layer to Bottom Layer, tented both sides, 11 vias
v5: diameter 14.96, hole 9.84, Top Layer to Layer 2, tented both sides, 9 vias
v6: diameter 14.96, hole 9.84, Top Layer to Layer 1, tented both sides, 8 vias
v7: diameter 23.62, hole 15.75, Top Layer to Bottom Layer, tented both sides, 1 vias

## Nets (pads, with @x,y where several pads share a name; then routed paths per layer and width w, separated by ;. In a path a pad name is that pad's centre, name@x,y a point inside that pad or via, vN(x,y) a via of type N, cw(c..) or ccw(c..) an arc to the next point about the centre after c; other vN are vias at no path point)
DVDD: C14.1 IC2.F2 IC2.G3 | length 140.9
  Top Layer w7: v4(1620,4892) IC2.F2 IC2.G3
  Bottom Layer w7: v4(1620,4892) 1620,4807.46 C14.1
  other v6: 1620,4892
GND: BUCK.2 C1.1 C2.2 C3.1 C4.1 C5.1 C6.1 C7.1 C10.1 C11.2 C12.2 C13.2 C14.2 C15.2 C16.2 C17.1 C21.1 C22.2 C23.1 C25.1 C26.1 C27.1 IC2.A1 IC2.B1 IC2.B2 IC2.C3 IC2.C11 IC2.D1 IC2.D4 IC2.D10 IC2.E3 IC2.G2 IC2.K4 IC2.K10 IC2.M12 J1.2 J1.4 J1.6 J1.8 J1.10 J2.2 J2.4 J2.6 J2.7 J2.8 J2.9 J2.10 J3.4 J3.5 J3.6 J3.7 J3.8 J3.9 L1_BLE.2 LED.1 P1.3 P1.5 P1.6 P1.7 P1.8 P1.9 RESET.2 SD.6 SD.11 SD.12 | length 1497.4
  Top Layer w5: v6(1568,4994) 1568.61,4994 1581.02,4981.59 IC2.B1@1581.64,4982.2 ; IC2.D1 1581.64,4929.21 1591.25,4919.6 v6(1591.25,4917.87) ; IC2.A1 1592.36,4996.46 1592.36,4992.31 ; IC2.B1@1582.84,4981.59 IC2.B1 1592.36,4992.31 ; v6(1594,4866) 1594.43,4866 1606.8,4853.64 IC2.G2 ; IC2.B2 1596.5,4992.31 1592.36,4992.31 ; IC2.E3 IC2.D4 ; IC2.C3 1632.82,4955.59 1646,4942.41 v6(1646,4942) 1646.41,4942 1658,4930.41 IC2.D4 ; IC2.K4 v6(1735.18,4853.64) ; IC2.K10 v6(1735.18,4853.64) ; IC2.D10 v6(1735.18,4853.64) ; IC2.C11 1837.77,4956 1849.77,4968 v6(1850,4968) ; IC2.M12 1875.24,4713.58 v6(1875.39,4713.58) ; IC2.D4 v6(1735.18,4853.64)
  Top Layer w8: LED.1 LED.1@1891.53,4302 ; C27.1 1892.9,4171.15 1944.24,4171.15 1949.27,4166.13 1949.27,4164.16 1960.03,4153.39 C23.1 1963.97,4153.39 1994.57,4184 BUCK.2 2192.03,4184 2222.03,4214 C25.1 ; C26.1@1977.39,4302 C26.1 ; C2.2 1999.86,4506.29 2055.31,4506.29 2060,4510.98 2060,4648 2043.98,4664.02 2041.58,4661.62 2027.87,4661.62 C1.1 ; C22.2 2132,5028.14 2147.92,5012.21 2151.79,5012.21 2188.61,4975.39 C5.1
  Bottom Layer w8: J2.2 J2.2@2609.7,4583.25 ; J2.4 J2.4@2609.7,4619.25
  other v1: 1020,5010 1050,5010 1080,5010 1170,5012 1224,5012 1280,5040 1280,5080 1280,5120 1280,5160 1280,5200 1280,5240 1280,5280 1040,5320 1080,5320 1120,5320 1160,5320 1200,5320 1240,5320 1280,5320
IMU_CS: IC2.C7 J1.9 | length 1099
  Top Layer w7: IC2.C7@1735.59,4956 IC2.C7 1735.18,4955.41 1762,4928.59 v5(1762,4928)
  Top Layer w8: v2(2402,4558) 2547.73,4558 2573.53,4583.8 2608.3,4583.8 J1.9
  Layer 2 w7: v5(1762,4928) 1816,4874 1816,4794 1968.41,4641.59
  Layer 2 w8: 1968.41,4641.59 2052,4558 v2(2402,4558)
IMU_MISO: IC2.C8 J1.5 | length 1061
  Top Layer w7: IC2.C8 1760.77,4955.59 1787.96,4928.41 v5(1787.96,4928)
  Top Layer w8: v2(2318,4668) 2396.97,4589.03 2496.69,4589.03 2570.26,4662.6 2608.3,4662.6 J1.5
  Layer 2 w7: v5(1787.96,4928) 1844,4871.96 1844,4824 1968.41,4699.59
  Layer 2 w8: 1968.41,4699.59 2000,4668 v2(2318,4668)
IMU_MOSI: IC2.A9 J1.3 | length 1168.8
  Top Layer w7: IC2.A9 1806,5026.82 1806,5076.82
  Top Layer w8: 1806,5076.82 1806,5091.5 1810.69,5096.19 v2(1872,5096.19) ; v2(2358,4742) 2393.96,4706.04 2396.3,4703.7 2460.51,4703.7 2462.85,4706.04 2463.56,4706.76 cw(c2486,4694) 2508.02,4707.46 ccw(c2514.81,4711.7) 2511.04,4704.65 2512.8,4703.7 2514.81,4703.7 J1.3
  Layer 2 w8: v2(1872,5096.19) 2167.81,5096.19 2358,4906 v2(2358,4742)
IMU_SCLK: IC2.B8 J1.7 | length 1260.1
  Top Layer w5: IC2.B8 1760.77,4982.18 1772,4993.41 v5(1772,4994)
  Top Layer w8: v2(2304,4914) 2326.15,4891.85 2354.05,4863.95 2598.47,4863.95 2653.5,4808.92 2653.5,4633.63 2646.47,4626.6 2611.7,4626.6 J1.7
  Layer 2 w5: v5(1772,4994) 1844,5066 1844,5068 1968.41,5068
  Layer 2 w8: 1968.41,5068 2150,5068 v2(2304,4914)
NetANT_1: ANT.1 L2_BLE.1 | length 153.4
  Top Layer w20: L2_BLE.1 1120.85,4958.98 1124,4962.13 ANT.1
NetBUCK_4: BUCK.4 C25.2 | length 99.7
  Top Layer w15: BUCK.4 2132.86,4150.91 2218,4150.91 C25.2
NetC1_BLE_1: C1_BLE.1 IC2.C1 | length 113.6
  Top Layer w20: C1_BLE.1@1468,4956 IC2.C1
NetC1_BLE_2: C1_BLE.2 L1_BLE.1 L2_BLE.2 | length 253.2
  Top Layer w20: L2_BLE.2 1254.9,4958 1255,4958.1 L1_BLE.1 1336.08,4956 C1_BLE.2
NetC6_2: C6.2 IC2.N12 | length 182.6
  Top Layer w7: 1855.07,4632.82 1863.13,4640.88 IC2.N12
  Top Layer w8: C6.2 1790,4567.75 1855.07,4632.82
NetC16_1: C16.1 IC2.B5 L1.1 | length 875.4
  Top Layer w5: IC2.B5 1684,4981.8 1696,4993.8 v4(1696,4994)
  Top Layer w8: L1.1 2048,5270 C16.1 2049.13,5206.87 2104.87,5206.87 v3(2106,5208)
  Bottom Layer w5: v4(1696,4994) 1696,5076.82
  Bottom Layer w8: 1696,5076.82 1696,5224 1792,5320 2004,5320 2106,5218 v3(2106,5208)
NetC17_2: C17.2 IC2.B13 IC2.C4 | length 315
  Top Layer w5: IC2.B13 1901.13,4994 v4(1904,4994)
  Top Layer w7: IC2.C4 1658.41,4956.2 1670,4967.8 v4(1670,4968)
  Bottom Layer w5: C17.2 1752,5000 1766,5014 1884,5014 v4(1904,4994)
  Bottom Layer w7: v4(1670,4968) 1748,4968 C17.2
NetIC2_A3: IC2.A3 J3.2 | length 1334.5
  Top Layer w7: v5(1600,5040) IC2.A3
  Top Layer w8: J3.2 1819.39,4007.17 1834,4021.77 v2(1834,4026)
  Layer 2 w7: v5(1600,5040) 1628,5068 1692,5068 1742,5018 1742,4632.82
  Layer 2 w8: 1742,4632.82 1742,4118 v2(1834,4026)
NetIC2_B3: IC2.B3 J3.3 | length 1265.6
  Top Layer w7: v5(1620,4994) 1620.2,4994 1632.61,4981.59 IC2.B3
  Top Layer w8: v2(1784,4026) 1785.95,4024.05 1785.95,3950.29 J3.3
  Layer 2 w7: v5(1620,4994) 1620,5012.08 1618,5014.08 1618,5030 1638,5050 1670,5050 1714,5006 1714,4632.82
  Layer 2 w8: 1714,4632.82 1714,4096 v2(1784,4026)
NetIC2_B4: IC2.B4 L1.2 | length 771.5
  Top Layer w5: IC2.B4 1658.41,4982 1670,4993.59 v4(1670,4994)
  Top Layer w8: L1.2 v3(2050,5388)
  Bottom Layer w5: v4(1670,4994) 1670,5076.82
  Bottom Layer w8: 1670,5076.82 1670,5254 1802,5386 2048,5386 v3(2050,5388)
NetIC2_M1: IC2.M1 P1.2 | length 693
  Top Layer w7: 1518.41,4720.41 1523.68,4725.69 IC2.M1
  Top Layer w8: P1.2@1302,4280.57 1312.57,4270 P1.2
  Top Layer w10: P1.2 1348,4646 1396,4694 1492,4694 1518.41,4720.41
NetIC2_N2: IC2.N2 P1.4 | length 735.2
  Top Layer w7: IC2.N2 1607.23,4679.24 1653.65,4632.82
  Top Layer w8: P1.4 1388.35,4220 1416.92,4248.57 1416.92,4506.92 1496.19,4586.19 1636.19,4586.19 1658,4608 1658,4628.47 1653.65,4632.82
NetLED_2: LED.2 R11.1 | length 256.8
  Top Layer w15: LED.2 2133.15,4366.58 R11.1
NetR4_1: R4.1 SD.8 | length 172.4
  Bottom Layer w8: SD.8 1063.69,3997.36 1111.31,3997.36 1154,3954.67 R4.1
NetR6_1: R6.1 SD.1 | length 593
  Bottom Layer w8: SD.1 1066,4301.15 1078.73,4313.88 1078.73,4318.8 1110,4350.07 1110,4433.31 1088.89,4454.42 1088.89,4490.89 1160,4562 1304,4562 1372,4494 1372,4465.53 R6.1
NetR7_1: R7.1 SD.9 | length 314.8
  Bottom Layer w8: SD.9 1402.89,4404.89 1417.19,4419.19 1417.19,4433.48 1424.22,4440.51 1473.53,4440.51 1501.92,4412.12 1501.92,4377.32 1506.61,4372.64 1531.36,4372.64 R7.1
NetR8_1: R8.1 SD.10 | length 432
  Bottom Layer w8: R8.1 1225.75,4333.75 1232.79,4326.7 ccw(c1256,4338) 1244.7,4314.79 1277.15,4282.34 1279.5,4280 1327.92,4280 1448.87,4400.95 SD.10
PPG_SCLK: IC2.M11 J2.5 | length 1417.1
  Top Layer w7: IC2.M11 1837.54,4725.02 1849.48,4713.09 v4(1849.48,4711.97)
  Bottom Layer w7: 1576,4632.82 1576,4658 1594,4676 1840,4676 1849.48,4685.48 v4(1849.48,4711.97)
  Bottom Layer w8: 1576,4632.82 1576,4616.69 1580.69,4612 2069.09,4612 2097.74,4640.65 J2.5
PPG_SDA: IC2.L13 J2.3 | length 827.8
  Top Layer w7: IC2.L13 1912,4728 1968.41,4728
  Top Layer w8: 1968.41,4728 v3(1984,4728) ; v3(2486,4614.84) v3(2486,4694)
  Bottom Layer w8: v3(1984,4728) 2452,4728 v3(2486,4694) ; v3(2486,4614.84) 2499.59,4601.25 J2.3
RST: IC2.A8 P1.10 R2.1 RESET.1 | length 1978.4
  Top Layer w7: 1749.18,5076.82 1760.77,5065.23 ; IC2.A8 1760.77,5065.23 ; 1760.77,5076.82 1760.77,5065.23
  Top Layer w8: P1.10 1490,4070 v2(1492,4072) ; v2(1722,5104) 1749.18,5076.82 ; 1760.77,5076.82 1760.77,5102.77 1780,5122 1882,5122 1892,5132 1892,5155.31 1896.69,5160 1917.75,5160 R2.1 1936.17,5173.92 1936.17,5389.04 1920.93,5404.28 RESET.1
  Layer 2 w7: 1518.41,5016.41 1578.82,5076.82
  Layer 2 w8: v2(1492,4072) 1492,4074.05 1476.19,4089.86 1476.19,4974.19 1518.41,5016.41 ; 1578.82,5076.82 1606,5104 v2(1722,5104)
SD_CLK: IC2.N9 SD.5 | length 1377.9
  Top Layer w7: 1746.82,4632.82 1786.36,4672.36 IC2.N9
  Top Layer w8: v3(1520,4112) 1541.21,4090.79 1666.79,4090.79 1730,4154 1730,4414 1634.04,4509.96 1634.04,4551.64 1676.22,4593.82 1707.82,4593.82 1746.82,4632.82
  Bottom Layer w8: SD.5 1073.81,4115.19 1512.58,4115.19 1515.77,4112 v3(1520,4112)
SD_CS: IC2.L8 R5.1 SD.2 | length 1472
  Top Layer w7: IC2.L8 v4(1774,4738)
  Bottom Layer w7: 1522,4632.82 1522,4714 1546,4738 v4(1774,4738)
  Bottom Layer w8: R5.1 1121.3,4464 1126.16,4459.14 1126.16,4442.61 1152,4416.76 1152,4333.89 1088.53,4270.42 1073.65,4270.42 SD.2 1394.23,4257.84 1454.89,4318.5 1536.01,4318.5 1564.86,4347.34 1564.86,4501.79 1522,4544.65 1522,4632.82
SD_MISO_DO: IC2.M9 R3.1 SD.7 | length 1820.3
  Top Layer w7: IC2.M9 v4(1800,4712)
  Bottom Layer w7: 1518.41,4764.41 1524,4770 1831.9,4770 1836,4765.9 1836,4736 1812.71,4712.71 1800.71,4712.71 v4(1800,4712)
  Bottom Layer w8: R3.1 1281.94,3894 1277.08,3898.86 1277.08,3908.66 1157,4028.73 1073.65,4028.73 1053.6,4048.79 1022.69,4048.79 1018,4053.47 1018,4518 1082,4582 1336,4582 1518.41,4764.41
SD_MOSI_DI: IC2.L9 R1.1 SD.3 | length 1711.5
  Top Layer w7: IC2.L9 1786.54,4751.28 1799.82,4738 v4(1800,4738)
  Layer 2 w8: v3(1111.03,4232.03) 1112.03,4232.03 1220,4340 1254,4340 v3(1256,4338)
  Bottom Layer w7: 1554,4632.82 1554,4684 1576,4706 1768,4706 v4(1800,4738)
  Bottom Layer w8: v3(1111.03,4232.03) 1093.54,4214.54 SD.3 1073.65,4201.96 1088.53,4201.96 1094.49,4196 1532,4196 1636,4300 1636,4500 1554,4582 1554,4632.82 ; v3(1256,4338) 1256,4339.67 1272,4355.67 R1.1
VCC: BUCK.5 C3.2 C4.2 C26.2 FB1.1 FB2.2 FB3.1 IC2.A2 J1.1 J2.1 P1.1 R1.2 R3.2 R4.2 R5.2 R6.2 R7.2 R8.2 R11.2 SD.4 | length 10072.4
  Top Layer w7: 1537.59,5076.82 IC2.A2
  Top Layer w15: v3(1122,3824) 1172,3874 1172,3992 ; v3(1188.66,4361.21) 1187.76,4360.32 P1.1 1107.55,4270 1068,4230.45 1068,4096 1172,3992 ; 1537.59,5076.82 1528,5086.41 C3.2 1529.52,5144.91 1558.45,5144.91 1578.91,5165.37 C4.2@1587.91,5165.37 ; C4.2 1596,5246 1636,5286 1728,5286 1774,5240 ; FB3.1 1774,5240 ; FB1.1 1877.02,4572 1842,4536.98 1842,4488 1890,4440 2043.2,4440 2098,4494.8 2098,4665.13 1988.66,4774.48 1988.66,4981.07 FB2.2@2015.02,5007.43 ; FB2.2 FB2.2@2015.02,5007.43 ; C26.2 2032.61,4307.55 2039.87,4300.28 2138.28,4300.28 R11.2 ; J1.1 2468.48,4743.1 2433.43,4778.16 2333.79,4778.16 ccw(c2333.79,4763.16) 2322.72,4773.27 ccw(c2466.18,4643.17) 2275.51,4677.16 2275.5,4677.09 ccw(c2339,4665.84) 2300,4614.48 2300,4381.04 2140.36,4221.4 BUCK.5 ; 1172,3992 1395.68,3992 1443.75,4040.07 1448.1,4044.42 1454.32,4044.42 1458.27,4044.42 ccw(c1495.99,4107.26) 1508.33,4035.02 ccw(c1498.57,4092.28) 1542.9,4054.75 cw(c1554.3,4045) 1544.13,4056.02 1548.44,4060 1666.41,4060 1862.41,4256 2082.14,4256 2116.74,4221.4 BUCK.5 ; 1774,5240 1774,5291.08 1732,5333.08 1732,5456 1778,5502 2042,5502 2234,5310 2234,5006 ; FB2.2@2015.02,5007.43 1984,5038.44 1984,5077.07 2022.93,5116 2124,5116 2234,5006 ; BUCK.5 2128.55,4287.12 R11.2 ; R11.2 2147.91,4298.56 2234,4384.66 2234,5006
  Bottom Layer w15: SD.4 1597.23,4171.23 ; v3(1122,3824) 1152,3824 1181.19,3853.19 1181.19,3892.64 1182.54,3894 R4.2 R3.2 1252,3892.76 1252,3862 1290,3824 1600,3824 1650,3874 1650,4076 1597.23,4128.77 1597.23,4171.23 ; R5.2 R5.2@1150.98,4464 ; v3(1188.66,4361.21) 1188.66,4426.33 R5.2@1150.98,4464 ; R7.2 1542,4434 1502,4474 1427.3,4474 1379.69,4426.39 1352.79,4426.39 1344,4435.18 R6.2 R1.2 1300.7,4464 1299.34,4465.36 1299.34,4480.11 1287.09,4492.36 1209.64,4492.36 1195.61,4478.33 1195.61,4467.36 R8.2 1192.25,4464 R5.2@1150.98,4464 ; J2.1 1987.85,4561.85 1597.23,4171.23
VCC_FB2: C5.2 C7.2 C21.2 C22.1 FB2.1 IC2.A10 IC2.A13 IC2.D11 IC2.M4 R2.2 | length 2310.6
  Top Layer w5: IC2.A13 1920,5038.46 1920,5076.82
  Top Layer w7: v5(1644.96,4740.55) 1644.96,4739.79 1658.41,4726.35 IC2.M4 ; IC2.A10 1828.77,5024 1871.91,5024 IC2.A13 ; IC2.D11 1837.98,4930.41 1849.57,4942 v5(1850,4942)
  Top Layer w8: v2(1659.85,4540.95) 1798.81,4402 2080,4402 2158,4480 2158,4774 2136,4796 C7.2@2087.84,4796 ; 1920,5076.82 R2.2 ; C21.2 2015.33,4953.33 2029.33,4953.33 2084,5008 ; FB2.1@2015.02,5060.57 FB2.1 FB2.1@2016.98,5060.57 ; FB2.1@2025.78,5069.37 FB2.1@2016.98,5060.57 ; v2(2058,4856) 2058.19,4856.19 2085.81,4856.19 2094,4848 ; C7.2 2083.97,4796 2087.84,4799.87 2087.84,4801.84 2094,4808 2094,4848 ; FB2.1@2016.98,5060.57 2067.43,5060.57 2084,5044 2084,5008 ; 2084,5008 2084,4984.94 2102.08,4966.86 2130,4966.86 C22.1 2134,4966.86 2134,4853.39 C5.2 2094,4848
  Layer 2 w7: 1598.19,4632.82 1598.19,4716.19 1622.55,4740.55 v5(1644.96,4740.55) ; v5(1850,4942) 1850,4904 1898,4856 1968.41,4856
  Layer 2 w8: 1598.19,4632.82 1598.19,4599.81 1657.05,4540.95 v2(1659.85,4540.95) ; 1968.41,4856 v2(2058,4856)
VDD: BUCK.1 BUCK.3 C23.2 C27.2 J3.1 | length 827.3
  Top Layer w15: C27.2@1887.96,4199.68 1859.68,4199.68 1812,4152 1812,4089.45 1863.31,4038.14 1863.31,4013.86 1854.73,4005.27 1850.89,4001.44 1850.89,3995.23 1850.89,3979.77 J3.1 1883.23,3948.34 1909.54,3974.65 1909.54,4045.38 1946,4081.84 2029.21,4081.84 2038,4090.63 BUCK.3 ; C27.2@1888.14,4199.86 1957.81,4199.86 C23.2@1960.56,4202.61 ; C23.2@1962.26,4202.34 1963.7,4202.34 1971.23,4209.87 1971.23,4211.31 1981.32,4221.4 BUCK.1
VDD_NS: C10.2 C11.1 FB3.2 IC2.A5 | length 355.1
  Top Layer w7: 1680,5076.82 1680,5011.57 1684,5007.57 IC2.A5
  Top Layer w8: 1680,5076.82 C11.1@1680,5173 ; C11.1 C11.1@1680,5173 ; C10.2 1776.6,5154.25 FB3.2 1700.01,5156.85 1699.79,5157.07 1695.92,5157.07 C11.1@1680,5173
VDDA: C1.2 C2.1 FB1.2 IC2.M13 IC2.N13 | length 429
  Top Layer w7: IC2.M13@1889.19,4725.22 IC2.M13 1888.72,4725.02 1891.37,4722.38 1891.37,4703.4 1888.72,4700.76 IC2.N13 1956,4632.82
  Top Layer w8: FB1.2 1917.15,4518.85 1960.7,4562.4 1992.83,4562.4 C2.1 2025.22,4565.57 2029.91,4570.26 2029.91,4616.74 2029.84,4616.81 2029.84,4624.31 2025.97,4628.19 2023.94,4628.19 2023,4627.25 1961.57,4627.25 1956,4632.82
VDDR: C12.1 C13.1 FB4.1 IC2.C2 IC2.D2 IC2.E2 | length 969.3
  Top Layer w7: 1518.41,4650.22 1613.65,4650.22 v4(1614.17,4649.7) ; IC2.E2 IC2.D2 IC2.C2 1607.61,4956 1619.61,4968 v4(1620,4968)
  Top Layer w8: FB4.1 1476.57,4659.02 1485.37,4650.22 1518.41,4650.22
  Bottom Layer w7: v4(1614.17,4649.7) 1843.7,4649.7 1878,4684 1878,4842 1821.46,4898.54 C12.1 1763.05,4903.5 C13.1 1664.5,4903.5 1620,4948 v4(1620,4968)
VRef: C15.1 FB4.2 IC2.A4 IC2.F3 | length 1500.2
  Top Layer w7: 1588.38,5076.82 1658.02,5007.18 IC2.A4 1658.41,5007.84 1644,5022.25 v5(1644,5024) ; IC2.F3 1645.59,4892 v5(1646,4892)
  Top Layer w8: FB4.2 1450,4633.43 1471.43,4612 v2(1624,4612) ; v2(1502,4818) 1441.14,4818 1441.14,4824.14 1455.92,4838.93 1462.07,4838.93 1485.81,4862.67 1494.44,4862.67 1501.77,4870 v7(1506,4870) ; v3(1564.75,5099.25) 1565.95,5099.25 1588.38,5076.82
  Layer 2 w7: 1518.41,4820 1574,4820 v5(1646,4892) ; v5(1644,5024) 1644,4926 1662,4908 1662,4650 1644.82,4632.82
  Layer 2 w8: v2(1502,4818) 1504,4820 1518.41,4820
  Layer 2 w10: v2(1624,4612) 1644.82,4632.82
  Bottom Layer w7: 1518.41,4859.33 1519.35,4858.39 1591.46,4858.39 1596,4862.93 1596,5068 1587.18,5076.82
  Bottom Layer w8: v7(1506,4870) 1507.74,4870 1518.41,4859.33 ; v3(1564.75,5099.25) 1587.18,5076.82
pads on no net: ANT.2 IC2.A6 IC2.A7 IC2.A11 IC2.A12 IC2.B6 IC2.B7 IC2.B9 IC2.B10 IC2.B11 IC2.B12 IC2.C5 IC2.C6 IC2.C9 IC2.C10 IC2.C12 IC2.C13 IC2.D3 IC2.D12 IC2.D13 IC2.E1 IC2.E11 IC2.E12 IC2.E13 IC2.F1 IC2.F11 IC2.F12 IC2.F13 IC2.G1 IC2.G11 IC2.G12 IC2.G13 IC2.H1 IC2.H2 IC2.H3 IC2.H11 IC2.H12 IC2.H13 IC2.J1 IC2.J2 IC2.J3 IC2.J11 IC2.J12 IC2.J13 IC2.K1 IC2.K2 IC2.K3 IC2.K11 IC2.K12 IC2.K13 IC2.L1 IC2.L2 IC2.L3 IC2.L4 IC2.L5 IC2.L6 IC2.L7 IC2.L10 IC2.L11 IC2.L12 IC2.M2 IC2.M3 IC2.M5 IC2.M6 IC2.M7 IC2.M8 IC2.M10 IC2.N1 IC2.N3 IC2.N4 IC2.N5 IC2.N6 IC2.N7 IC2.N8 IC2.N10 IC2.N11 J1.G1 J1.G2 J2.G1 J2.G2 SD.13 SD.14
copper on no net: | length 0.6
  Top Layer w5: 1684,4750.7 1684,4751.28

## Polygon pours and split planes (outlines as drawn)
GND on Layer 1 "GND_L01" (solid, pour order 0): 998,5526 2664,5526 2664,3616 998,3616 998,5684
GND on Bottom Layer "GND_Bottom" (solid, pour order 1): 1010,4586 1010,3610 2664,3610 2664,5526 1010,5526 1010,4544
GND on Layer 2 "GND_L01" (solid, pour order 3): 1004,5528 2656,5528 2668,5516 2668,3608 1006,3608 1002,3612
GND on Top Layer "GND_L01" (solid, pour order 2): 1000,5526 1002,5524 2664,5524 2664,3612 2662,3610 996,3610

## Other copper
Top Layer:
  pour cut-out: 1004,5297.91 1259.91,5297.91 1259.91,5042 1004,5042
  text "Harsh Rajoria / JY-16 Capstone" at 2122,3762 h40

## Text inside footprints (layer, text, board x,y; h text height)
J2: Mechanical 1 "J1" at 2510,4630.93 h30 r270
J3: Mechanical 1 "PCB EDGE" at 1287.9,3648.34 h35.43